# Altium PCB SmartToy_MainBoard_REV02 PCB.PcbDoc (part 1 of 3)
Units mm, origin at the board's own origin, x right, y up, seen from the top; angles counter-clockwise.
Board outline 55 x 50 mm, 2 copper layers (Top Layer, Bottom Layer), stack 0.98 mm thick; 120 components, 113 nets, 389 pads, 211 vias.
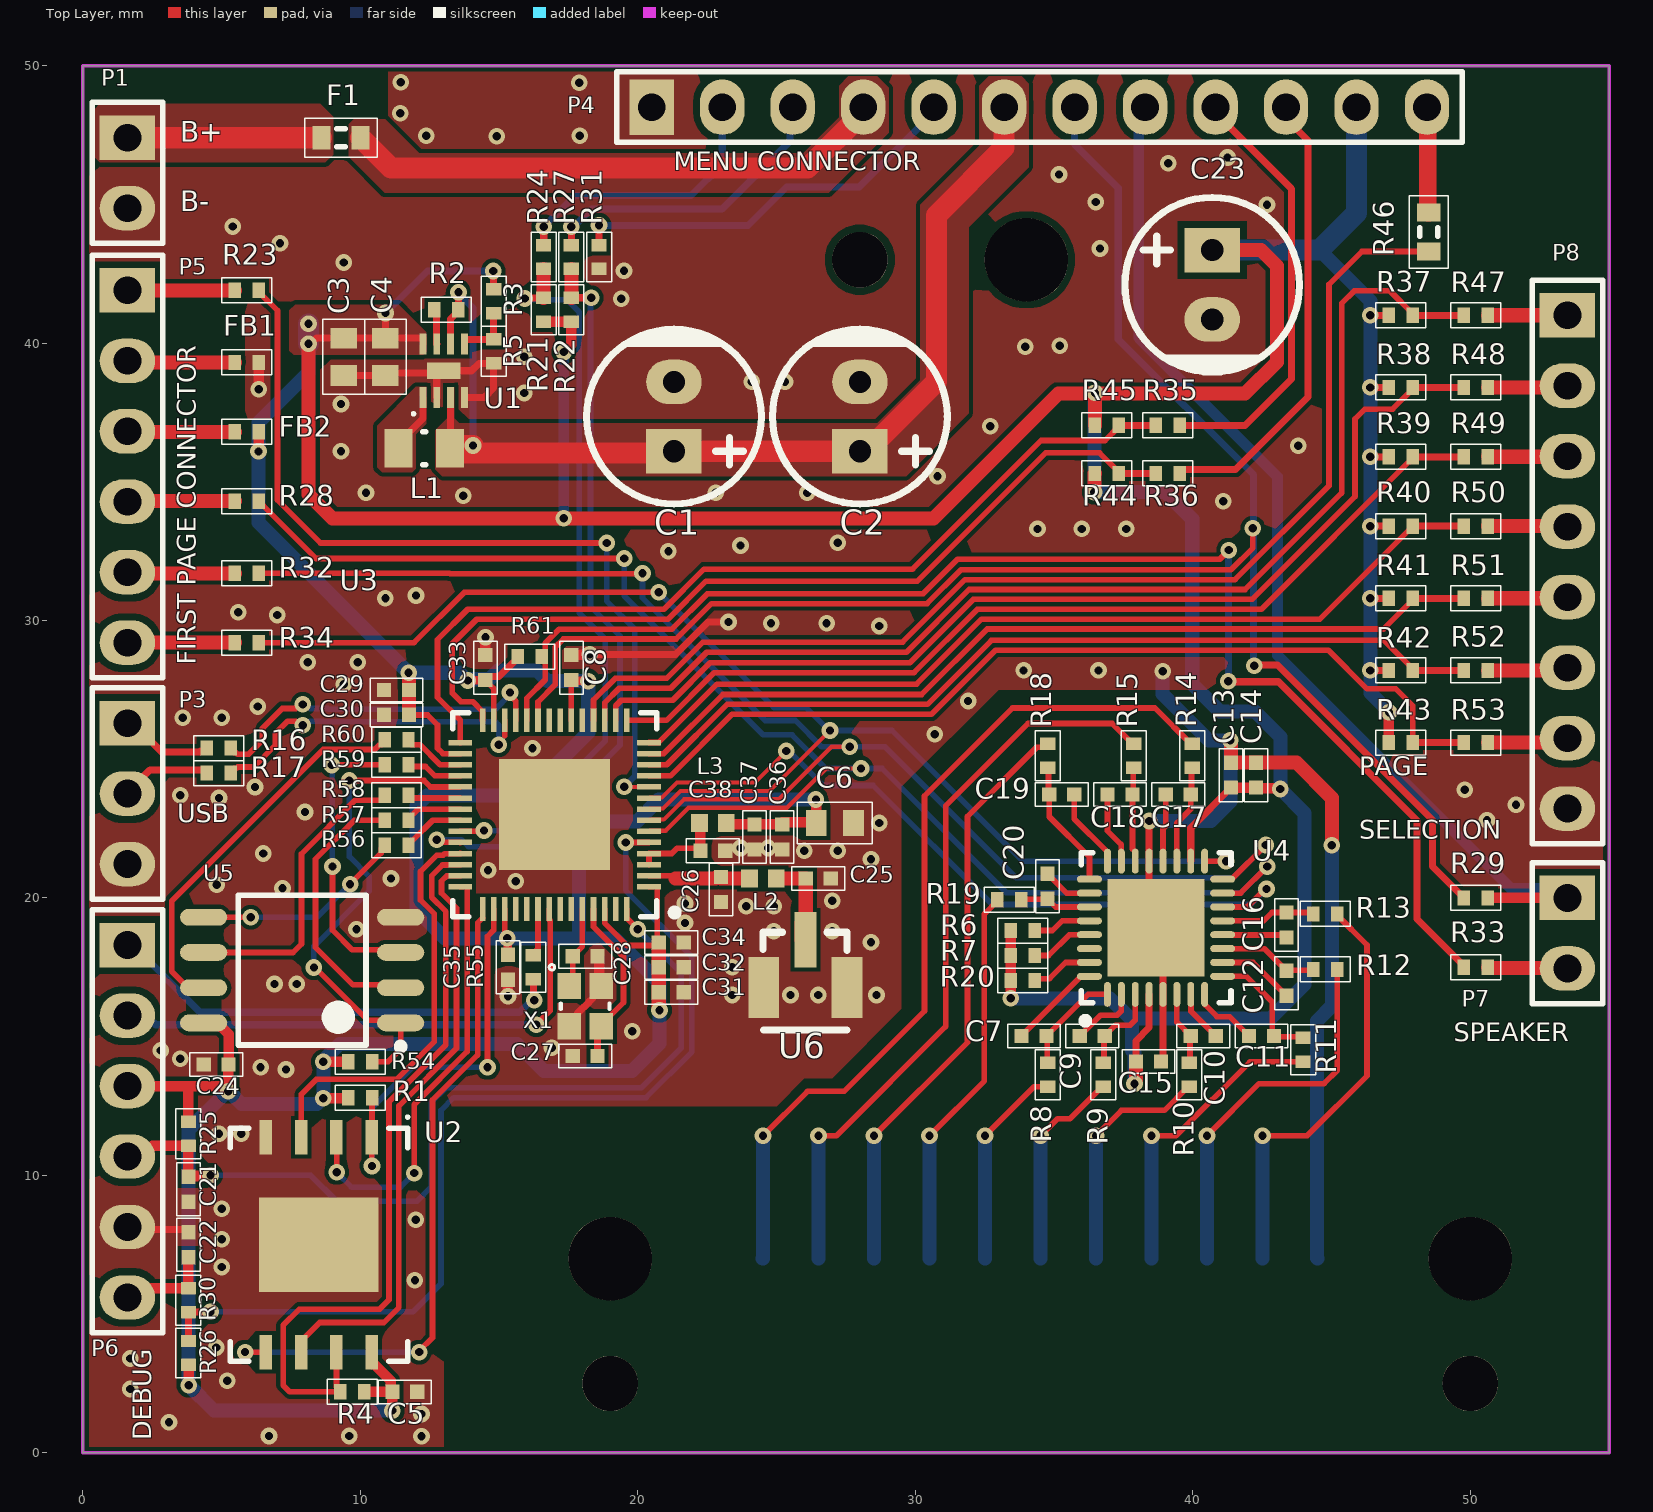
[diagram p0: Top Layer view]
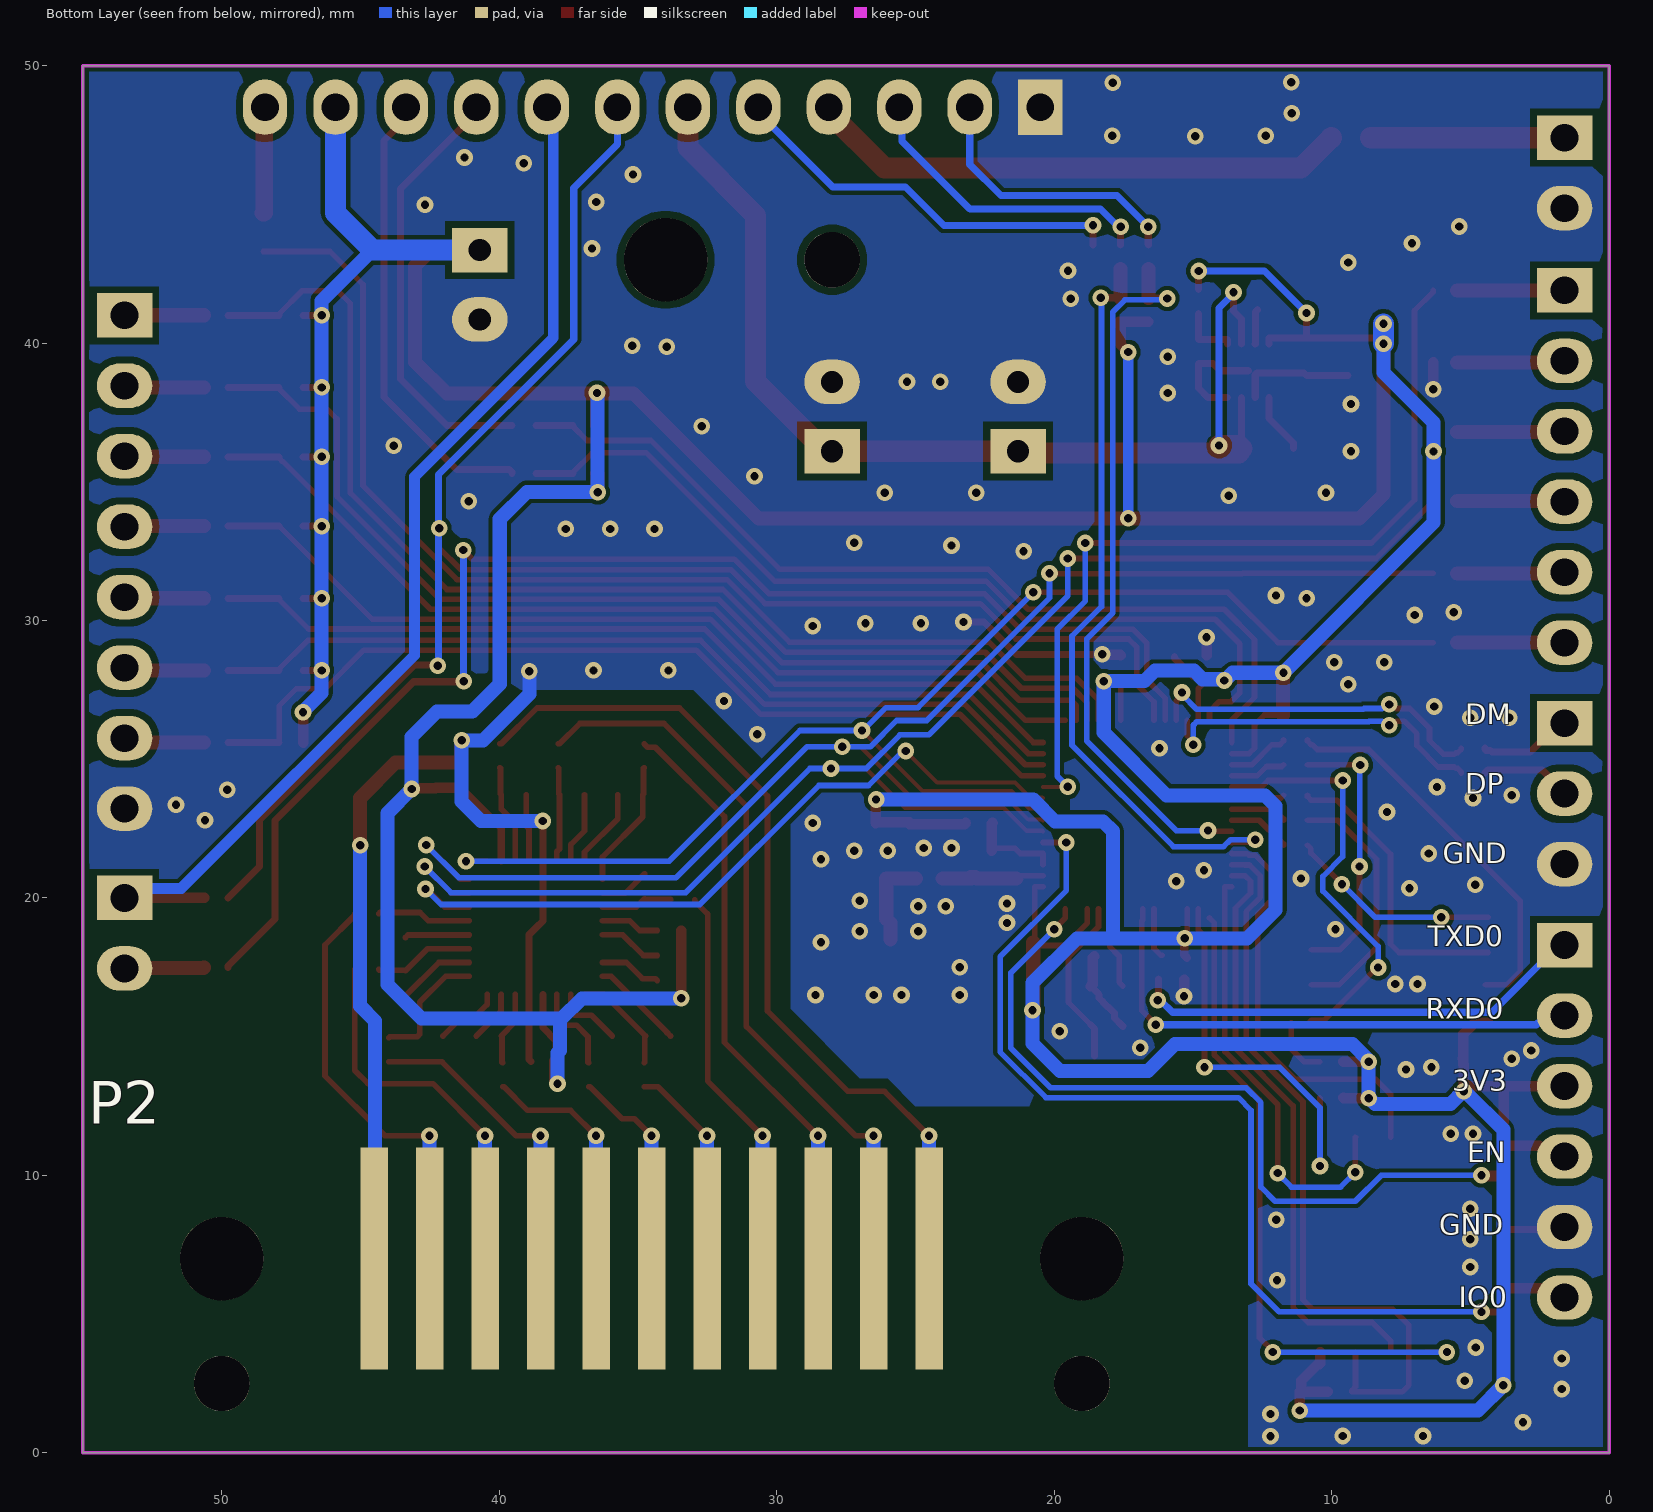
[diagram p1: Bottom Layer view, seen from below]
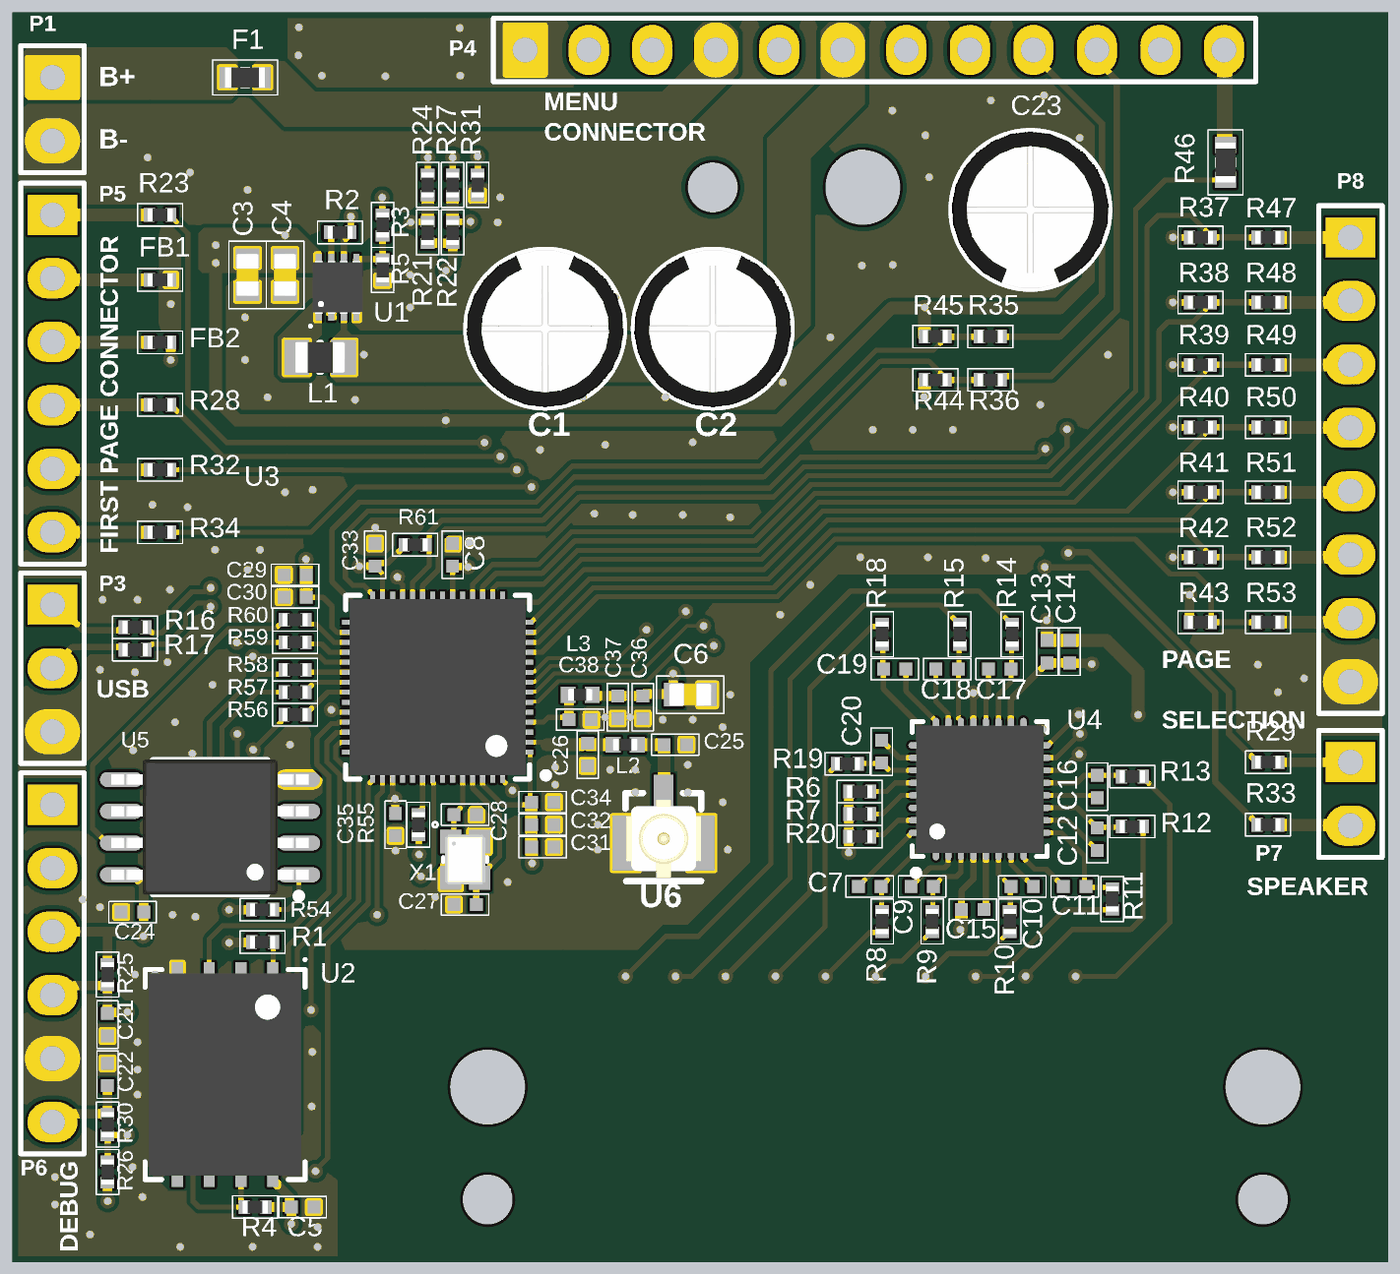
[diagram p3: 3D render of the assembled board from above, using the file's embedded part models]

## Layer stack, top to bottom
Top Solder: solder mask 0.0102, Solder Resist, Dk 3.5
Top Layer: signal copper 0.035
Dielectric 1: dielectric 0.91, FR-4, Dk 4.8
Bottom Layer: signal copper 0.035
Bottom Solder: solder mask 0.0102, Solder Resist, Dk 3.5

## Board outline
0,0 0,50 55,50 55,0

## Design rules (kind name [scope] priority, off if disabled: settings)
Clearance [All] p1: gap=0.152 ignorepadtopadclearanceinfootprint=FALSE except(0.254: THPad-Fill THPad-Poly THPad-Region)
DiffPairsRouting [All] p1: maxlimit=0.254 minlimit=0.152 mostfreqgap=0.254 toplayer_minwidth=0.203 toplayer_maxwidth=0.381 toplayer_prefwidth=0.381 bottomlayer_minwidth=0.203 bottomlayer_maxwidth=0.381 bottomlayer_prefwidth=0.381 maxuncoupledlength=12.7
HoleSize [All] p1: absolutevalues=TRUE maxlimit=5 minlimit=0.025 maxpercent=80.000 minpercent=20.000
HoleToHoleClearance [All] p1: gap=0.025 allowstackedmicrovias=TRUE
MinimumSolderMaskSliver [All] p1: minsoldermaskwidth=0.025
PolygonConnect [All] p1: connectstyle=Direct reliefconductorwidth=0.254 reliefentries=4 polygonreliefangle="90 Angle" airgapwidth=0.254
RoutingVias [All] p1: holewidth=0.3 width=0.6 viastyle="Through Hole" minholewidth=0.3 minwidth=0.6 maxholewidth=0.3 maxwidth=0.6
SilkToSilkClearance [All] p1: silktosilkclearance=0.025
SilkToSolderMaskClearance [IsPad] p1: minsilkscreentomaskgap=0.025 clearancetoexposedcopper=TRUE
SolderMaskExpansion [All] p1: expansion=0.102 istentingtop=FALSE
Width [All] p1: maxlimit=0.762 minlimit=0.152 preferedwidth=0.254
24 further rules are at their usual default settings.

## Classes and differential pairs
net class DIFF90: D_N D_P USB_D_N USB_D_P
differential pair USB_D: +USB_D_P -USB_D_N
differential pair D: +D_P -D_N

## Components (designator, comment, footprint, x,y, rotation, side; value= is the part's Value field where it differs from the comment)
C1 "100uF" CP_6.3X12.5_P2.5MM 21.3,37.35 r90 top
C2 "100uF" CP_6.3X12.5_P2.5MM 28,37.35 r90 top
C3 "22uF" C0603M 9.4,39.5 r90 top
C4 "22uF" C0603M 10.9,39.5 r90 top
C5 "0.1uF" C0402M 11.6,2.2 r180 top
C6 "10uF" C0603M 27.1,22.7 r180 top
C7 "0.01uF" C0402M 34.275,15.025 r180 top
C8 "0.1uF" C0402M 17.6,28.3 r270 top
C9 "0.01uF" C0402M 36.375,15.025 r180 top
C10 "0.01uF" C0402M 40.375,15.025 r0 top
C11 "0.01uF" C0402M 42.475,15.025 r180 top
C12 "0.01uF" C0402M 43.375,16.925 r270 top
C13 "4.7uF" C0402M 41.375,24.425 r90 top
C14 "0.1uF" C0402M 42.275,24.425 r90 top
C15 "0.1uF" C0402M 38.4,14.1 r0 top
C16 "0.01uF" C0402M 43.375,19.025 r270 top
C17 "0.01uF" C0402M 39.475,23.725 r180 top
C18 "0.01uF" C0402M 37.375,23.725 r180 top
C19 "0.01uF" C0402M 35.275,23.725 r0 top
C20 "0.01uF" C0402M 34.757,20.421 r90 top
C21 "0.1uF" C0402M 3.8,9.5 r90 top
C22 "0.1uF" C0402M 3.8,7.5 r270 top
C23 "100uF" CP_6.3X12.5_P2.5MM 40.7,42.1 r270 top
C24 "0.1uF" C0402M 4.8,14 r0 top
C25 "TBD" C0402M 26.5,20.7 r180 top
C26 "TBD" C0402M 23,20.3 r90 top
C27 "12pF" C0402M 18.1,14.3 r0 top
C28 "12pF" C0402M 18.1,17.9 r180 top
C29 "1uF" C0402M 11.3,27.5 r0 top
C30 "0.1uF" C0402M 11.3,26.6 r0 top
C31 "1uF" C0402M 21.2,16.6 r180 top
C32 "100pF" C0402M 21.2,17.5 r180 top
C33 "0.1uF" C0402M 14.5,28.3 r270 top
C34 "0.1uF" C0402M 21.2,18.4 r180 top
C35 "0.1uF" C0402M 15.316,17.501 r90 top
C36 "1uF" C0402M 25.2,22.2 r90 top
C37 "0.1uF" C0402M 24.2,22.2 r90 top
C38 "0.1uF" C0402M 22.7,21.7 r180 top
F1 "MF-FSML125/8-2" R0603M 9.3,47.4 r0 top
FB1 "120R" R0402M 5.9,39.3 r180 top
FB2 "120R" R0402M 5.9,36.8 r180 top
L1 "1uH" IND_0805 12.3,36.2 r180 top
L2 "TBD" IND_0402 24.5,20.7 r180 top
L3 "2nH" IND_0402 22.7,22.7 r180 top
P1 "Header 2" HDR1X2 1.6,47.4 r270 top
P2 "Header 11" TOUCH_CONTACT_MAINBOARD 34.5,7 r180 bottom locked
P3 "Header 3" HDR1X3 1.6,26.3 r270 top
P4 "Header 12" HDR1X12 20.5,48.5 r0 top
P5 "Header 6" HDR1X6 1.6,41.9 r270 top
P6 "Header 6" HDR1X6 1.6,18.3 r270 top
P7 "Header 2" HDR1X2 53.5,20 r270 top
P8 "Header 8" HDR1X8 53.5,41 r270 top
R1 "10k" R0402M 10,12.8 r180 top
R2 "1M" R0402M 13.1,41.2 r180 top
R3 "267k" R0402M 14.8,41.5 r90 top
R4 "10k" R0402M 9.7,2.2 r0 top
R5 "100k" R0402M 14.8,39.7 r90 top
R6 "4.7k" R0402M 33.875,18.825 r0 top
R7 "4.7k" R0402M 33.875,17.925 r0 top
R8 "4.7k" R0402M 34.775,13.625 r90 top
R9 "4.7k" R0402M 36.775,13.625 r90 top
R10 "4.7k" R0402M 39.875,13.625 r90 top
R11 "4.7k" R0402M 43.975,14.525 r90 top
R12 "4.7k" R0402M 44.775,17.425 r180 top
R13 "4.7k" R0402M 44.775,19.425 r180 top
R14 "4.7k" R0402M 39.975,25.125 r270 top
R15 "4.7k" R0402M 37.875,25.125 r270 top
R16 "0.0" R0402M 4.9,25.4 r180 top
R17 "0.0" R0402M 4.9,24.5 r180 top
R18 "4.7k" R0402M 34.775,25.125 r270 top
R19 "4.7k" R0402M 33.385,19.939 r0 top
R20 "100k" R0402M 33.875,17.025 r180 top
R21 "100k" R0402M 16.6,41.2 r270 top
R22 "100k" R0402M 17.6,41.2 r270 top
R23 "1k" R0402M 5.9,41.9 r180 top
R24 "1k" R0402M 16.6,43.1 r90 top
R25 "10k" R0402M 3.8,11.5 r90 top
R26 "10k" R0402M 3.8,3.6 r270 top
R27 "1k" R0402M 17.6,43.1 r90 top
R28 "1k" R0402M 5.9,34.3 r180 top
R29 "27R" R0402M 50.2,20 r180 top
R30 "100" R0402M 3.8,5.5 r90 top
R31 "100" R0402M 18.6,43.1 r90 top
R32 "1k" R0402M 5.9,31.7 r180 top
R33 "27R" R0402M 50.2,17.5 r180 top
R34 "1k" R0402M 5.9,29.2 r180 top
R35 "1k" R0402M 39.1,37.033 r0 top
R36 "1k" R0402M 39.1,35.3 r0 top
R37 "100k" R0402M 47.5,41 r180 top
R38 "100k" R0402M 47.5,38.4 r180 top
R39 "100k" R0402M 47.5,35.9 r180 top
R40 "100k" R0402M 47.5,33.4 r180 top
R41 "100k" R0402M 47.5,30.8 r180 top
R42 "100k" R0402M 47.5,28.2 r180 top
R43 "100k" R0402M 47.5,25.6 r180 top
R44 "100k" R0402M 36.9,35.3 r180 top
R45 "100k" R0402M 36.9,37.033 r180 top
R46 "330R" R0603M 48.5,44 r90 top
R47 "1k" R0402M 50.2,41 r0 top
R48 "1k" R0402M 50.2,38.4 r0 top
R49 "1k" R0402M 50.2,35.9 r0 top
R50 "1k" R0402M 50.2,33.4 r0 top
R51 "1k" R0402M 50.2,30.8 r0 top
R52 "1k" R0402M 50.2,28.2 r0 top
R53 "1k" R0402M 50.2,25.6 r0 top
R54 "10k" R0402M 10,14.1 r180 top
R55 "499" R0402M 16.231,17.501 r270 top
R56 "0.0" R0402M 11.3,21.9 r180 top
R57 "0.0" R0402M 11.3,22.8 r180 top
R58 "0.0" R0402M 11.3,23.7 r180 top
R59 "0.0" R0402M 11.3,24.8 r180 top
R60 "0.0" R0402M 11.3,25.7 r180 top
R61 "10k" R0402M 16.1,28.7 r180 top
U1 "MIC2875-AYMT-T5" SON50P200X60_HS-9N 13,39 r90 top
U2 "W25N01GVZEIG TR" SON127P800X80_HS-9N 8.5,7.5 r270 top
U3 "ESP32-S2" QFN40P700X700X90_HS-57N 17,23 r180 top
U4 "AT42QT1110-MUR" QFN50P500X500X100_HS-33N 38.675,18.925 r90 top
U5 "W25Q128JVSIM" SOIC127P790X216-8N 7.9,17.4 r180 top
U6 "1909763-1" IPEX_ANT 26.036,18.489 r90 top
X1 "40MHz" FA-128 18.1,16.1 r270 top

## Footprints (in the part's own frame and the unit in brackets; to place one, negate y for a bottom-side part, rotate by r counter-clockwise, add the part's x,y. Pads: shape width x height; smd on the part's side, far side on the other; paste and mask are expansions set on the pad)
C0402M [mm] "Capacitor 0402"
  rect 0.51x0.51 smd: 1(-0.45,0) 2(0.45,0)
  silkscreen extent -0.95,-0.43 0.95,0.43, body extent -0.53,-0.28 0.53,0.27, height 0.55
C0603M [mm] "Chip Capacitor 0603"
  rect 0.75x0.95 smd: 1(-0.675,0) 2(0.675,0)
  silkscreen extent -1.35,-0.75 1.35,0.75, body extent -0.85,-0.45 0.85,0.45, height 0.9
CP_6.3X12.5_P2.5MM [mm] "Expart: UPJ1C680MED1TD"
  rect 1.6x2 hole 0.8: 1(-1.25,0)
  oval 1.6x2 hole 0.8: 2(1.25,0)
  silkscreen extent -3.15,-3.15 3.15,3.15, body extent -3.15,-3.15 3.15,3.15, height 11.01
FA-128 [mm]
  rect 0.95x0.85 smd: 1(-0.725,-0.575) 2(0.725,-0.575) 3(0.725,0.575) 4(-0.725,0.575)
  silkscreen extent -1.5,-1.3 0.1,0.88, body extent -1,-0.8 1,0.8, height 0.7
HDR1X2 [mm] "Connector; Header; 2 Position"
  rect 1.6x2 hole 1: 1(0,0)
  oval 1.6x2 hole 1: 2(2.54,0)
  silkscreen extent -1.27,-1.27 3.81,1.27
HDR1X3 [mm] "Connector; Header; 3 Position"
  rect 1.6x2 hole 1: 1(0,0)
  oval 1.6x2 hole 1: 2(2.54,0) 3(5.08,0)
  silkscreen extent -1.27,-1.27 6.35,1.27
HDR1X6 [mm] "Connector; Header; 6 Position"
  rect 1.6x2 hole 1: 1(0,0)
  oval 1.6x2 hole 1: 2(2.54,0) 3(5.08,0) 4(7.62,0) 5(10.16,0) 6(12.7,0)
  silkscreen extent -1.27,-1.27 13.97,1.27
HDR1X8 [mm] "Connector; Header; 8 Position"
  rect 1.6x2 hole 1: 1(0,0)
  oval 1.6x2 hole 1: 2(2.54,0) 3(5.08,0) 4(7.62,0) 5(10.16,0) 6(12.7,0) 7(15.24,0) 8(17.78,0)
  silkscreen extent -1.27,-1.27 19.05,1.27
HDR1X12 [mm] "Connector; Header; 12 Position"
  rect 1.6x2 hole 1: 1(0,0)
  oval 1.6x2 hole 1: 2(2.54,0) 3(5.08,0) 4(7.62,0) 5(10.16,0) 6(12.7,0) 7(15.24,0) 8(17.78,0) 9(20.32,0) 10(22.86,0) 11(25.4,0) 12(27.94,0)
  silkscreen extent -1.27,-1.27 29.21,1.27
IND_0402 [mm] "Chip Inductor, 2-Leads, Body 1.00x0.50mm, IPC Medium Density"
  rect 0.6x0.64 smd: 1(-0.48,0) 2(0.48,0)
  body extent -0.5,-0.25 0.5,0.25, height 0.5
IND_0805 [mm] "Chip Inductor, 2-Leads, Body 2.00x1.25mm, IPC Medium Density"
  rect 1x1.39 smd: 1(-0.93,0) 2(0.93,0)
  silkscreen extent -0.05,-0.6 0.05,0.6, body extent -1,-0.63 1,0.63, height 1.25
IPEX_ANT [mm]
  rect 2x0.8 smd: 1(0,0)
  rect 2.2x1.1 smd: 2(-1.725,-1.5) 2(-1.725,1.5)
  silkscreen extent -3.25,-1.5 0.28,1.52, body extent -3.1,-1.5 0,1.5, height 1.25
QFN40P700X700X90_HS-57N [mm] "QFN, 56-Leads, Body 7.00x7.00mm, Pitch 0.40mm, Thermal Pad 4.00x4.00mm, IPC Medium Density"
  rect 0.85x0.2 smd: 1(-3.4,2.6) 2(-3.4,2.2) 3(-3.4,1.8) 4(-3.4,1.4) 5(-3.4,1) 6(-3.4,0.6) 7(-3.4,0.2) 8(-3.4,-0.2) 9(-3.4,-0.6) 10(-3.4,-1) 11(-3.4,-1.4) 12(-3.4,-1.8) 13(-3.4,-2.2) 14(-3.4,-2.6) 29(3.4,-2.6) 30(3.4,-2.2) 31(3.4,-1.8) 32(3.4,-1.4) 33(3.4,-1) 34(3.4,-0.6) 35(3.4,-0.2) 36(3.4,0.2) 37(3.4,0.6) 38(3.4,1) 39(3.4,1.4) 40(3.4,1.8) 41(3.4,2.2) 42(3.4,2.6)
  rect 0.2x0.85 smd: 15(-2.6,-3.4) 16(-2.2,-3.4) 17(-1.8,-3.4) 18(-1.4,-3.4) 19(-1,-3.4) 20(-0.6,-3.4) 21(-0.2,-3.4) 22(0.2,-3.4) 23(0.6,-3.4) 24(1,-3.4) 25(1.4,-3.4) 26(1.8,-3.4) 27(2.2,-3.4) 28(2.6,-3.4) 43(2.6,3.4) 44(2.2,3.4) 45(1.8,3.4) 46(1.4,3.4) 47(1,3.4) 48(0.6,3.4) 49(0.2,3.4) 50(-0.2,3.4) 51(-0.6,3.4) 52(-1,3.4) 53(-1.4,3.4) 54(-1.8,3.4) 55(-2.2,3.4) 56(-2.6,3.4)
  rect 4x4 smd: 57(0,0)
  silkscreen extent -4.45,-3.67 3.67,3.68, body extent -3.53,-3.53 3.53,3.53, height 0.9
QFN50P500X500X100_HS-33N [mm] "QFN, 32-Leads, Body 5.00x5.00mm, Pitch 0.50mm, Thermal Pad 3.50x3.50mm, IPC Medium Density"
  oval 0.9x0.25 smd: 1(-2.4,1.75) 2(-2.4,1.25) 3(-2.4,0.75) 4(-2.4,0.25) 5(-2.4,-0.25) 6(-2.4,-0.75) 7(-2.4,-1.25) 8(-2.4,-1.75) 17(2.4,-1.75) 18(2.4,-1.25) 19(2.4,-0.75) 20(2.4,-0.25) 21(2.4,0.25) 22(2.4,0.75) 23(2.4,1.25) 24(2.4,1.75)
  oval 0.25x0.9 smd: 9(-1.75,-2.4) 10(-1.25,-2.4) 11(-0.75,-2.4) 12(-0.25,-2.4) 13(0.25,-2.4) 14(0.75,-2.4) 15(1.25,-2.4) 16(1.75,-2.4) 25(1.75,2.4) 26(1.25,2.4) 27(0.75,2.4) 28(0.25,2.4) 29(-0.25,2.4) 30(-0.75,2.4) 31(-1.25,2.4) 32(-1.75,2.4)
  rect 3.5x3.5 smd: 33(0,0)
  silkscreen extent -3.47,-2.7 2.7,2.7, body extent -2.56,-2.56 2.56,2.56, height 1
R0402M [mm] "Chip Resistor 0402"
  rect 0.45x0.55 smd: 1(-0.432,0) 2(0.432,0)
  silkscreen extent -0.9,-0.45 0.9,0.45, body extent -0.5,-0.25 0.5,0.25, height 0.4
R0603M [mm] "Chip Resistor 0603"
  rect 0.65x0.85 smd: 1(-0.7,0) 2(0.7,0)
  silkscreen extent -1.3,-0.7 1.3,0.7, body extent -0.8,-0.4 0.8,0.4, height 0.55
SOIC127P790X216-8N [mm] "SOIC, 8-Leads, Body 5.30x5.30mm, Pitch 1.27mm, IPC Medium Density"
  oval 1.7x0.6 smd: 1(-3.55,1.905) 2(-3.55,0.635) 3(-3.55,-0.635) 4(-3.55,-1.905) 5(3.55,-1.905) 6(3.55,-0.635) 7(3.55,0.635) 8(3.55,1.905)
  silkscreen extent -3.68,-2.7 2.3,2.88, body extent -3.95,-2.7 3.95,2.7, height 2.16
SON50P200X60_HS-9N [mm] "SON, 8-Leads, Body 2.00x2.00mm, Pitch 0.50mm, Thermal Pad 1.20x0.60mm, IPC Medium Density"
  rect 0.75x0.25 smd: 1(-0.965,0.75) 2(-0.965,0.25) 3(-0.965,-0.25) 4(-0.965,-0.75) 5(0.965,-0.75) 6(0.965,-0.25) 7(0.965,0.25) 8(0.965,0.75)
  rect 0.6x1.2 smd: 9(0,0)
  silkscreen extent -1.6,1.04 -1.5,1.14, body extent -1.05,-1 1.05,1, height 0.6
SON127P800X80_HS-9N [mm] "SON, 8-Leads, Body 6.00x8.00mm, Pitch 1.27mm, Thermal Pad 4.30x3.40mm, IPC Medium Density"
  rect 1.25x0.45 smd: 1(-3.87,1.905) 2(-3.87,0.635) 3(-3.87,-0.635) 4(-3.87,-1.905) 5(3.87,-1.905) 6(3.87,-0.635) 7(3.87,0.635) 8(3.87,1.905)
  rect 3.4x4.3 smd paste-1.7: 9(0,0)
  silkscreen extent -4.65,-3.2 4.2,3.25, body extent -4.05,-3.05 4.05,3.05, height 0.8
TOUCH_CONTACT_MAINBOARD [mm]
  rect 1x8 smd: 1(-10,0) 2(-8,0) 3(-6,0) 4(-4,0) 5(-2,0) 6(0,0) 7(2,0) 8(4,0) 9(6,0) 10(8,0) 11(10,0)

## Part data
C1 C2 C23: library part CAP_PL, "CAP ALUM 100UF 20% 16V RADIAL", Case/Package=Radial, Leakage Current=4uA, Manufacturer 1=Nichicon, Manufacturer Part Number 1=UPS1C101MED, Max Operating Temperature=105°C, Min Operating Temperature=-55°C, Package Quantity=200, Ripple Current=250mA, Supplier Part Number 1=493-15821-ND, Tolerance=20%, Voltage=16V, Capacitance=100uF, Category="Aluminum Electrolytic Capacitors", ComponentLink1Description=https://datasheet.ciiva.com/30527/getdatasheetpartid-388103-30527200.pdf?src-supplier=Verical, ComponentLink1URL=https://datasheet.ciiva.com/30527/getdatasheetpartid-388103-30527200.pdf?src-supplier=Verical, ComponentLink2Description=https://datasheet.ciiva.com/11777/0900766b8064973a-11777900.pdf?src-supplier=RSComponents, ComponentLink2URL=https://datasheet.ciiva.com/11777/0900766b8064973a-11777900.pdf?src-supplier=RSComponents, ComponentLink3Description=https://datasheet.ciiva.com/17525/e-ps-17525750.pdf?src-supplier=Avnet+Europe, ComponentLink3URL=https://datasheet.ciiva.com/17525/e-ps-17525750.pdf?src-supplier=Avnet+Europe, ComponentLink4Description=https://datasheet.ciiva.com/109/e-ps-109463.pdf?src-supplier=Digi-Key, ComponentLink4URL=https://datasheet.ciiva.com/109/e-ps-109463.pdf?src-supplier=Digi-Key, ComponentLink5Description=https://datasheet.ciiva.com/11686/e-ps-11686127.pdf?src-supplier=Avnet, ComponentLink5URL=https://datasheet.ciiva.com/11686/e-ps-11686127.pdf?src-supplier=Avnet, Construction=RADIAL, Diameter=6.3mm, Height=11mm, Height - Seated (Max)=0.492inch, Impedance=500mR, Lead Diameter=0.5mm, Lead Pitch=2.5mm, Life (Hours)=2000Hour, Mount="Through Hole", Packaging=Bulk, Pricing 1="1=0.40000, 10=0.27300, 50=0.18220, 100=0.15480, 500=0.10930, 1000=0.09563, 2500=0.09108, 5000=0.08425 (USD)", Radiation Hardening=No, RoHS=Yes, RoHS Compliant=Yes, Series=PS, Stock 1=11875, Supplier 1=Digi-Key, Termination=Radial, Voltage Rating=16V
C3 C4: library part CAP_CER, "CAP CER 22UF 10V X5R 0603", Case Code (Imperial)=0603, Case Code (Metric)=1608, Dielectric=X5R, Manufacturer=Samsung, Manufacturer Part Number=CL10A226MP8NUNE, Max Operating Temperature=85°C, Min Operating Temperature=-55°C, Supplier Part Number 1=1276-1274-1-ND, Tolerance=20%, Voltage Rating=10V, Capacitance=22uF, Case/Package=0603, ComponentLink1Description=https://datasheet.ciiva.com/26838/getdatasheetpartid-746477-26838370.pdf?src-supplier=Verical, ComponentLink1URL=https://datasheet.ciiva.com/26838/getdatasheetpartid-746477-26838370.pdf?src-supplier=Verical, ComponentLink2Description=https://datasheet.ciiva.com/25711/cl10a226mp8nune-25711532.pdf?src-supplier=Digi-Key, ComponentLink2URL=https://datasheet.ciiva.com/25711/cl10a226mp8nune-25711532.pdf?src-supplier=Digi-Key, Contact Plating=Tin, Depth=0.8mm, Height=0.8mm, Lead Free="Lead Free", Length=1.6mm, Mount="Surface Mount", Packaging="Tape and Reel", Pricing 1="1 = 0.20000, 10 = 0.14300, 50 = 0.08100, 100 = 0.06720, 500 = 0.04710, 1000 = 0.03900 (USD)", Radiation Hardening=No, RoHS=Yes, Stock 1=62306, Supplier 1=Digi-Key, Thickness=0.035inch, Width=0.031inch
C5 C8 C14 C15 C21 C22 C24 C30 C33 C34 C35 C37 C38: library part CAP_CER, "CAP CER 0.1UF 50V X7R 0402", Capacitance=100nF, Case Code (Imperial)=0402, Case Code (Metric)=1005, Dielectric=X7R, Dielectric Material=Ceramic, Manufacturer=Murata, Manufacturer Part Number=GRM155R71H104KE14D, Max Operating Temperature=125°C, Min Operating Temperature=-55°C, Package Quantity=10000, Supplier Part Number 1=490-10700-1-ND, Tolerance=10%, Voltage=50V, Case/Package=0402, ComponentLink1Description=https://datasheet.ciiva.com/25741/cl10b104kb8nnnl-25741341.pdf?src-supplier=Digi-Key, ComponentLink1URL=https://datasheet.ciiva.com/25741/cl10b104kb8nnnl-25741341.pdf?src-supplier=Digi-Key, ComponentLink2Description=https://datasheet.ciiva.com/26838/getdatasheetpartid-357523-26838415.pdf?src-supplier=Verical, ComponentLink2URL=https://datasheet.ciiva.com/26838/getdatasheetpartid-357523-26838415.pdf?src-supplier=Verical, ComponentLink3Description=http://www.farnell.com/datasheets/2079156.pdf?src-supplier=Farnell, ComponentLink3URL=http://www.farnell.com/datasheets/2079156.pdf?src-supplier=Farnell, ComponentLink4Description=http://www.mouser.com/ds/2/281/c02e-2905.pdf?src-supplier=Mouser, ComponentLink4URL=http://www.mouser.com/ds/2/281/c02e-2905.pdf?src-supplier=Mouser, ComponentLink5Description=http://components.arrow.com/part/dataview/0323_07030614?src-supplier=Arrow+Europe, ComponentLink5URL=http://components.arrow.com/part/dataview/0323_07030614?src-supplier=Arrow+Europe, ComponentLink6Description=https://search.murata.co.jp/Ceramy/image/img/A01X/G101/ENG/GRM155R71H104KE14-01.pdf?src-supplier=Digi-Key, ComponentLink6URL=https://search.murata.co.jp/Ceramy/image/img/A01X/G101/ENG/GRM155R71H104KE14-01.pdf?src-supplier=Digi-Key, ComponentLink7Description=http://psearch.en.murata.com/capacitor/product/GRM155R71H104KE14%23.pdf?src-supplier=Avnet, ComponentLink7URL=http://psearch.en.murata.com/capacitor/product/GRM155R71H104KE14%23.pdf?src-supplier=Avnet, ComponentLink8Description=http://www.farnell.com/datasheets/2079156.pdf?src-supplier=Element14, ComponentLink8URL=http://www.farnell.com/datasheets/2079156.pdf?src-supplier=Element14, ComponentLink9Description=http://www.farnell.com/datasheets/2079156.pdf?src-supplier=Newark, ComponentLink9URL=http://www.farnell.com/datasheets/2079156.pdf?src-supplier=Newark, Composition=Ceramic, Depth=0.5mm, Dissipation Factor=0.025%, Height=0.5mm, Lead Free="Lead Free", Length=1mm, Material=Ceramic, Mount="Surface Mount", Packaging="Tape and Reel", Pricing 1="1 = 0.10000, 10 = 0.04600, 100 = 0.02050, 500 = 0.01464, 1000 = 0.01150, 2500 = 0.01045, 5000 = 0.00961 (USD)", REACH SVHC="No SVHC", RoHS=Yes, Stock 1=2282266, Supplier 1=Digi-Key, Termination=SMD/SMT, Thickness=0.022inch, Voltage Rating=50V, Voltage Rating (DC)=50V, Weight=0.000212oz, Width=0.5mm
C6: library part CAP_CER, "CAP CER 10UF 16V X5R 0603", Case Code (Imperial)=0603, Case Code (Metric)=1608, Dielectric=X5R, Manufacturer="Taiyo Yuden", Manufacturer Part Number=EMK107BBJ106MA-T, Max Operating Temperature=85°C, Min Operating Temperature=-55°C, Package Quantity=1, Supplier Part Number 1=587-3238-1-ND, Tolerance=20%, Voltage Rating=16V, Capacitance=10uF, Case/Package=0603, Category="Ceramic Capacitors", ComponentLink1Description=https://datasheet.ciiva.com/6259/emk107bbj106ma-t-6259169.pdf?src-supplier=Digi-Key, ComponentLink1URL=https://datasheet.ciiva.com/6259/emk107bbj106ma-t-6259169.pdf?src-supplier=Digi-Key, ComponentLink2Description=https://datasheet.ciiva.com/15920/3emk107bbj106ma-t-15920482.pdf?src-supplier=Onlinecomponents.com, ComponentLink2URL=https://datasheet.ciiva.com/15920/3emk107bbj106ma-t-15920482.pdf?src-supplier=Onlinecomponents.com, ComponentLink3Description=https://datasheet.ciiva.com/34372/463emk107bbj106ma-t-34372674.pdf?src-supplier=Onlinecomponents.com, ComponentLink3URL=https://datasheet.ciiva.com/34372/463emk107bbj106ma-t-34372674.pdf?src-supplier=Onlinecomponents.com, ComponentLink4Description=https://datasheet.ciiva.com/6259/emk107bbj106ma-t-6259164.pdf?src-supplier=Digi-Key, ComponentLink4URL=https://datasheet.ciiva.com/6259/emk107bbj106ma-t-6259164.pdf?src-supplier=Digi-Key, ComponentLink5Description=https://datasheet.ciiva.com/6259/emk107bbj106ma-t-6259167.pdf?src-supplier=Digi-Key, ComponentLink5URL=https://datasheet.ciiva.com/6259/emk107bbj106ma-t-6259167.pdf?src-supplier=Digi-Key, ComponentLink6Description=https://datasheet.ciiva.com/13168/mlcc01-e-13168735.pdf?src-supplier=Mouser, ComponentLink6URL=https://datasheet.ciiva.com/13168/mlcc01-e-13168735.pdf?src-supplier=Mouser, Construction=Flat, Halogen Free="Halogen Free", Height=0.8mm, Length=0.063inch, Mount="Surface Mount", Packaging="Tape and Reel", Pricing 1="1=0.34000, 10=0.23400, 50=0.16400, 100=0.14060, 500=0.10544, 1000=0.08903 (USD)", REACH SVHC=Unknown, RoHS=Yes, RoHS Compliant=Yes, Series=M, Stock 1=599529, Supplier 1=Digi-Key, Termination=SMD/SMT, Thickness=0.031inch, Voltage Rating (DC)=16V, Width=0.031inch
C7 C9 C10 C11 C12 C16 C17 C18 C19 C20: library part CAP_CER, "CAP CER 10000PF 25V X7R 0402", Capacitance=10nF, Case Code (Imperial)=0402, Case Code (Metric)=1005, Dielectric=X7R, Manufacturer=Samsung, Manufacturer Part Number=CL05B103KA5NNNC, Max Operating Temperature=125°C, Min Operating Temperature=-55°C, Package Quantity=1, Supplier Part Number 1=1276-1057-1-ND, Tolerance=10%, Voltage Rating=25V, Case/Package=0402, ComponentLink1Description=https://datasheet.ciiva.com/11586/upy-gphc-x7r-6-3v-to-50v-8-11586326.pdf?src-supplier=Avnet, ComponentLink1URL=https://datasheet.ciiva.com/11586/upy-gphc-x7r-6-3v-to-50v-8-11586326.pdf?src-supplier=Avnet, ComponentLink2Description=https://datasheet.ciiva.com/17434/upy-gphc-x7r-6-3v-to-50v-8-17434572.pdf?src-supplier=Avnet+Europe, ComponentLink2URL=https://datasheet.ciiva.com/17434/upy-gphc-x7r-6-3v-to-50v-8-17434572.pdf?src-supplier=Avnet+Europe, ComponentLink3Description=https://datasheet.ciiva.com/15195/getdatasheetpartid-358612-15195635.pdf?src-supplier=Verical, ComponentLink3URL=https://datasheet.ciiva.com/15195/getdatasheetpartid-358612-15195635.pdf?src-supplier=Verical, ComponentLink4Description=https://datasheet.ciiva.com/16740/cl05b104kq5nnnc-16740683.pdf?src-supplier=Future+Electronics, ComponentLink4URL=https://datasheet.ciiva.com/16740/cl05b104kq5nnnc-16740683.pdf?src-supplier=Future+Electronics, Contact Plating=Tin, Depth=0.5mm, Height=0.5mm, Length=1mm, Mount="Surface Mount", Packaging="Tape and Reel", Pricing 1="1 = 0.10000, 10 = 0.01800, 50 = 0.00960, 100 = 0.00780, 500 = 0.00558, 1000 = 0.00439, 2500 = 0.00399, 5000 = 0.00367 (USD)", Radiation Hardening=No, RoHS=Yes, Stock 1=2714388, Supplier 1=Digi-Key, Thickness=0.022inch, Width=0.02inch
C13: library part CAP_CER, "CAP CER 4.7UF 16V X5R 0402", Case Code (Imperial)=0402, Case Code (Metric)=1005, Manufacturer=Samsung, Manufacturer Part Number=CL05A475MO5NUNC, Max Operating Temperature=85°C, Min Operating Temperature=-55°C, Supplier Part Number 1=1276-6836-6-ND, Tolerance=20%, Voltage Rating=16V, Capacitance=4.7uF, Case/Package=0402, ComponentLink1Description=https://datasheet.ciiva.com/25786/cl05a475mp5nrnc-25786963.pdf?src-supplier=Digi-Key, ComponentLink1URL=https://datasheet.ciiva.com/25786/cl05a475mp5nrnc-25786963.pdf?src-supplier=Digi-Key, ComponentLink2Description=https://datasheet.ciiva.com/16437/cl05b104kq5nnnc-16437353.pdf?src-supplier=Future+Electronics, ComponentLink2URL=https://datasheet.ciiva.com/16437/cl05b104kq5nnnc-16437353.pdf?src-supplier=Future+Electronics, ComponentLink3Description=http://www.farnell.com/datasheets/2710653.pdf?src-supplier=Farnell, ComponentLink3URL=http://www.farnell.com/datasheets/2710653.pdf?src-supplier=Farnell, ComponentLink4Description=http://www.farnell.com/datasheets/2710653.pdf?src-supplier=Newark, ComponentLink4URL=http://www.farnell.com/datasheets/2710653.pdf?src-supplier=Newark, ComponentLink5Description=http://www.samsungsem.com/kr/support/product-search/mlcc/CL05A475MO5NUNC.jsp?src-supplier=Digi-Key, ComponentLink5URL=http://www.samsungsem.com/kr/support/product-search/mlcc/CL05A475MO5NUNC.jsp?src-supplier=Digi-Key, Length=0.039inch, Mount="Surface Mount", Packaging="Tape and Reel", Pricing 1="1 = 0.45000, 10 = 0.32100, 100 = 0.21130, 500 = 0.15656, 1000 = 0.13307, 2500 = 0.12524, 5000 = 0.11741 (USD)", RoHS=Yes, Stock 1=1677309, Supplier 1=Digi-Key, Thickness=0.022inch, Width=0.02inch
C25 C26: library part CAP_CER, "CERAMIC CAPACITOR", Mouting Technology=SMT, Pin=2
C27 C28: library part CAP_CER, "CAP CER 12PF 50V C0G/NP0 0402", Case Code (Imperial)=0402, Case Code (Metric)=1005, Dielectric=C0G, Manufacturer=Murata, Manufacturer Part Number=GRM1555C1H120JA01J, Max Operating Temperature=125°C, Min Operating Temperature=-55°C, Package Quantity=50000, Supplier Part Number 1=490-11375-1-ND, Tolerance=5%, Voltage Rating=50V, Capacitance=12pF, Case/Package=0402, ComponentLink1Description=https://datasheet.ciiva.com/22698/1747438-22698389.pdf?src-supplier=Element14, ComponentLink1URL=https://datasheet.ciiva.com/22698/1747438-22698389.pdf?src-supplier=Element14, ComponentLink2Description=https://datasheet.ciiva.com/6271/grm1555c1h120ja01-01-6271078.pdf?src-supplier=Digi-Key, ComponentLink2URL=https://datasheet.ciiva.com/6271/grm1555c1h120ja01-01-6271078.pdf?src-supplier=Digi-Key, ComponentLink3Description=https://datasheet.ciiva.com/11789/0900766b80ef921d-11789079.pdf?src-supplier=RSComponents, ComponentLink3URL=https://datasheet.ciiva.com/11789/0900766b80ef921d-11789079.pdf?src-supplier=RSComponents, ComponentLink4Description=https://datasheet.ciiva.com/18184/getdatasheetpartid-316477-18184186.pdf?src-supplier=Verical, ComponentLink4URL=https://datasheet.ciiva.com/18184/getdatasheetpartid-316477-18184186.pdf?src-supplier=Verical, ComponentLink5Description=https://datasheet.ciiva.com/29200/453581-da-01-en-vs-kondensator-0402-29200129.pdf?src-supplier=Conrad, ComponentLink5URL=https://datasheet.ciiva.com/29200/453581-da-01-en-vs-kondensator-0402-29200129.pdf?src-supplier=Conrad, ComponentLink6Description=https://datasheet.ciiva.com/6271/partnumbering-e-01-6271081.pdf?src-supplier=Digi-Key, ComponentLink6URL=https://datasheet.ciiva.com/6271/partnumbering-e-01-6271081.pdf?src-supplier=Digi-Key, ComponentLink7Description=https://datasheet.ciiva.com/6271/partnumbering-e-01-6271084.pdf?src-supplier=Digi-Key, ComponentLink7URL=https://datasheet.ciiva.com/6271/partnumbering-e-01-6271084.pdf?src-supplier=Digi-Key, ComponentLink8Description=https://datasheet.ciiva.com/29538/partnumbering-e-01-29538559.pdf?src-supplier=Digi-Key, ComponentLink8URL=https://datasheet.ciiva.com/29538/partnumbering-e-01-29538559.pdf?src-supplier=Digi-Key, ComponentLink9Description=https://datasheet.ciiva.com/6271/partnumbering-e-01-6271189.pdf?src-supplier=Digi-Key, ComponentLink9URL=https://datasheet.ciiva.com/6271/partnumbering-e-01-6271189.pdf?src-supplier=Digi-Key, ComponentLink10Description=https://datasheet.ciiva.com/6271/partnumbering-e-01-6271194.pdf?src-supplier=Digi-Key, ComponentLink10URL=https://datasheet.ciiva.com/6271/partnumbering-e-01-6271194.pdf?src-supplier=Digi-Key, ComponentLink11Description=https://datasheet.ciiva.com/5437/product-5437157.pdf?src-supplier=Mouser, ComponentLink11URL=https://datasheet.ciiva.com/5437/product-5437157.pdf?src-supplier=Mouser, ComponentLink12Description=https://datasheet.ciiva.com/6271/partnumbering-e-01-6271190.pdf?src-supplier=Digi-Key, ComponentLink12URL=https://datasheet.ciiva.com/6271/partnumbering-e-01-6271190.pdf?src-supplier=Digi-Key, ComponentLink13Description=https://datasheet.ciiva.com/11608/product-11608545.pdf?src-supplier=Avnet, ComponentLink13URL=https://datasheet.ciiva.com/11608/product-11608545.pdf?src-supplier=Avnet, Depth=0.5mm, Height=0.5mm, Length=1mm, Mount="Surface Mount", Packaging="Tape and Reel", Pricing 1="1 = 0.10000, 10 = 0.03700, 50 = 0.02040, 100 = 0.01660, 500 = 0.01186, 1000 = 0.00932, 2500 = 0.00847, 5000 = 0.00779 (USD)", Radiation Hardening=No, RoHS=Yes, Stock 1=75852, Supplier 1=Digi-Key, Termination=SMD/SMT, Thickness=0.022inch, Voltage Rating (DC)=50V, Width=0.02inch
C29 C31 C36: library part CAP_CER, "CAP CER 1UF 16V X5R 0402", Case Code (Imperial)=0402, Case Code (Metric)=1005, Dielectric=X5R, Dielectric Material=Ceramic, Manufacturer 1=KEMET, Manufacturer Part Number 1=C0402C105M4PACTU, Max Operating Temperature=85°C, Min Operating Temperature=-55°C, Supplier Part Number 1=399-12288-1-ND, Tolerance=20%, Voltage Rating=16V, Capacitance=1uF, Case/Package=0402, Category="Ceramic Capacitors", ComponentLink1Description=http://www.farnell.com/datasheets/2747130.pdf?src-supplier=Farnell, ComponentLink1URL=http://www.farnell.com/datasheets/2747130.pdf?src-supplier=Farnell, ComponentLink2Description=http://www.kemet.com/docfinder?Partnumber=C0402C105M4PAC7867&src-supplier=Digi-Key, ComponentLink2URL=http://www.kemet.com/docfinder?Partnumber=C0402C105M4PAC7867&src-supplier=Digi-Key, ComponentLink3Description=http://www.farnell.com/datasheets/2747130.pdf?src-supplier=Newark, ComponentLink3URL=http://www.farnell.com/datasheets/2747130.pdf?src-supplier=Newark, ComponentLink4Description=https://api.kemet.com/component-edge/download/datasheet/C0402C105M4PAC7867.pdf?src-supplier=Digi-Key, ComponentLink4URL=https://api.kemet.com/component-edge/download/datasheet/C0402C105M4PAC7867.pdf?src-supplier=Digi-Key, Lead Free="Lead Free", Length=0.039inch, Mount="Surface Mount", Mouting Technology=SMT, Packaging="Tape and Reel", Pin=2, Pricing 1="1=0.12000, 10=0.08400, 50=0.04760, 100=0.03950, 500=0.02770, 1000=0.02294, 2500=0.02135, 5000=0.01953 (USD)", RoHS=Yes, RoHS Compliant=Yes, Stock 1=30464, Supplier 1=Digi-Key, Thickness=0.022inch, Voltage Rating (DC)=16V, Width=0.02inch
C32: library part CAP_CER, "CAP CER 100PF 50V X7R 0402", Case Code (Imperial)=0402, Case Code (Metric)=1005, Dielectric=X7R, Manufacturer 1="Kyocera AVX", Manufacturer Part Number 1=04025C101KAT2A, Max Operating Temperature=125°C, Min Operating Temperature=-55°C, Package Quantity=1, Supplier Part Number 1=478-1089-1-ND, Tolerance=10%, Voltage=50V, Capacitance=100pF, Case/Package=0402, Category="Ceramic Capacitors", ComponentLink1Description=https://datasheet.ciiva.com/34303/1928935-34303276.pdf?src-supplier=Jameco, ComponentLink1URL=https://datasheet.ciiva.com/34303/1928935-34303276.pdf?src-supplier=Jameco, ComponentLink2Description=https://datasheet.ciiva.com/151/cx7r-151045.pdf?src-supplier=Digi-Key, ComponentLink2URL=https://datasheet.ciiva.com/151/cx7r-151045.pdf?src-supplier=Digi-Key, ComponentLink3Description=https://datasheet.ciiva.com/22619/1679506-22619749.pdf?src-supplier=Element14, ComponentLink3URL=https://datasheet.ciiva.com/22619/1679506-22619749.pdf?src-supplier=Element14, ComponentLink4Description=https://datasheet.ciiva.com/151/cx7r-151046.pdf?src-supplier=Digi-Key, ComponentLink4URL=https://datasheet.ciiva.com/151/cx7r-151046.pdf?src-supplier=Digi-Key, ComponentLink5Description=https://datasheet.ciiva.com/151/cx7r-151047.pdf?src-supplier=Digi-Key, ComponentLink5URL=https://datasheet.ciiva.com/151/cx7r-151047.pdf?src-supplier=Digi-Key, ComponentLink6Description=https://datasheet.ciiva.com/28453/1679506-28453959.pdf?src-supplier=Element14, ComponentLink6URL=https://datasheet.ciiva.com/28453/1679506-28453959.pdf?src-supplier=Element14, ComponentLink7Description=https://datasheet.ciiva.com/5415/cx7r-218113-5415051.pdf?src-supplier=Mouser, ComponentLink7URL=https://datasheet.ciiva.com/5415/cx7r-218113-5415051.pdf?src-supplier=Mouser, ComponentLink8Description=https://datasheet.ciiva.com/28586/1818074-28586573.pdf?src-supplier=Element14, ComponentLink8URL=https://datasheet.ciiva.com/28586/1818074-28586573.pdf?src-supplier=Element14, ComponentLink9Description=https://datasheet.ciiva.com/28586/1679506-28586589.pdf?src-supplier=Element14, ComponentLink9URL=https://datasheet.ciiva.com/28586/1679506-28586589.pdf?src-supplier=Element14, ComponentLink10Description=https://datasheet.ciiva.com/16287/cx7r-16287262.pdf?src-supplier=Future+Electronics, ComponentLink10URL=https://datasheet.ciiva.com/16287/cx7r-16287262.pdf?src-supplier=Future+Electronics, Construction=Flat, Depth=0.5mm, Lead Free="Lead Free", Length=1mm, Mount="Surface Mount", Mouting Technology=SMT, Number of Pins=2, Packaging="Tape and Reel", Pin=2, Pricing 1="1=0.10000, 10=0.03200, 50=0.01720, 100=0.01410, 500=0.01006, 1000=0.00791, 2500=0.00719, 5000=0.00661 (USD)", Radiation Hardening=No, REACH SVHC="No SVHC", RoHS=Yes, RoHS Compliant=Yes, Series=-, Stock 1=1401008, Supplier 1=Digi-Key, Termination=SMD/SMT, Thickness=0.022inch, Voltage Rating=50V, Voltage Rating (DC)=50V, Width=0.02inch
F1: library part FUSE, "PTC RESET FUSE 8V 1.25A 0603", Manufacturer 1=Bourns, Supplier Part Number 1=MF-FSML125/8-2TR-ND, Associated Product=01000056Z, Manufacturer Part Number 1=MF-FSML125/8-2, Pricing 1="6000=0.53200 (USD)", RoHS=No, Stock 1=6000, Supplier 1=Digi-Key
FB1 FB2: library part FB, "FERRITE BEAD 120 OHM 0402 1LN", Case Code (Imperial)=0402, Case Code (Metric)=1005, Current Rating=2A, DC Resistance (DCR)=55mR, Manufacturer=Murata, Manufacturer Part Number=BLM15PX121SN1D, Max Operating Temperature=125°C, Min Operating Temperature=-55°C, Package Quantity=10000, Supplier Part Number 1=490-9656-1-ND, Test Frequency=100MHz, Tolerance=25%, Case/Package=0402, Category=Inductors, ComponentLink1Description=https://datasheet.ciiva.com/41449/001172210-da-01-en-drossel-0402-120r-1-0x0-5mm-10000st-41449498.pdf?src-supplier=Conrad, ComponentLink1URL=https://datasheet.ciiva.com/41449/001172210-da-01-en-drossel-0402-120r-1-0x0-5mm-10000st-41449498.pdf?src-supplier=Conrad, ComponentLink2Description=https://datasheet.ciiva.com/29364/l0110e-29364069.pdf?src-supplier=Digi-Key, ComponentLink2URL=https://datasheet.ciiva.com/29364/l0110e-29364069.pdf?src-supplier=Digi-Key, ComponentLink3Description=https://datasheet.ciiva.com/41860/l0110e-41860699.pdf?src-supplier=Digi-Key, ComponentLink3URL=https://datasheet.ciiva.com/41860/l0110e-41860699.pdf?src-supplier=Digi-Key, Height=0.5mm, Impedance=120R, Lead Free="Lead Free", Length=1mm, Material=Steel, Max Current Rating=2A, Max DC Current=2A, Number of Circuits=1, Number of Lines=1, Number of Pins=2, Packaging="Tape and Reel", Pricing 1="1=0.12000, 10=0.09500, 25=0.07400, 50=0.06140, 100=0.05280, 250=0.04228, 500=0.03806, 1000=0.03171, 5000=0.02960 (USD)", REACH SVHC="No SVHC", RoHS=Yes, RoHS Compliant=Yes, Series="EMIFIL®, BLM15P", Stock 1=73734, Supplier 1=Digi-Key, Termination=SMD/SMT, Weight=2.3E-05oz, Width=0.5mm
L1: library part IND_SMD, "FIXED IND 1UH 1.3A 82.5 MOHM SMD", Case Code (Imperial)=0805, Case Code (Metric)=2012, Current Rating=1.3A, DC Resistance (DCR)=82.5mR, Inductance Tolerance=30%, Manufacturer 1=Murata, Manufacturer Part Number 1=LQM21PN1R0NGRD, Max Operating Temperature=125°C, Min Operating Temperature=-55°C, Package Quantity=4000, Self Resonant Frequency=50MHz, Supplier Part Number 1=490-7780-1-ND, Test Frequency=1MHz, Case/Package=0805, Category="Fixed Inductors", ComponentLink1Description=https://datasheet.ciiva.com/4965/l0075s0104lqm21p-gr-125292-4965537.pdf?src-supplier=Mouser, ComponentLink1URL=https://datasheet.ciiva.com/4965/l0075s0104lqm21p-gr-125292-4965537.pdf?src-supplier=Mouser, ComponentLink2Description=https://datasheet.ciiva.com/30490/0900766b812561d6-30490175.pdf?src-supplier=RSComponents, ComponentLink2URL=https://datasheet.ciiva.com/30490/0900766b812561d6-30490175.pdf?src-supplier=RSComponents, Core Material=Ferrite, DC Current=1.3A, Depth=1.4mm, Height=0.9mm, Height - Seated (Max)=0.039inch, Inductance=1uH, Length=2mm, Max DC Current=1.3A, Military Standard=Not, Mount="Surface Mount", Packaging="Tape and Reel", Pricing 1="1=0.24000, 10=0.21400, 25=0.18760, 50=0.16060, 100=0.14730, 250=0.13388, 500=0.12584, 1000=0.09639 (USD)", REACH SVHC="No SVHC", RoHS=Yes, RoHS Compliant=Yes, Series=LQM21PN_GR, Shielding=Shielded, Stock 1=20158, Supplier 1=Digi-Key, Termination=SMD/SMT, Tolerance=30%, Weight=0.000194oz, Width=0.049inch
L2: library part IND_SMD, "INDUCTOR SMD"
L3: library part IND_SMD, "FIXED IND 2NH 700MA 120 MOHM SMD", Case Code (Imperial)=0402, Case Code (Metric)=1005, Current Rating=700mA, DC Resistance (DCR)=120mR, Manufacturer 1="Taiyo Yuden", Manufacturer Part Number 1=HK10052N0S-T, Max DC Current=300mA, Max Operating Temperature=125°C, Min Operating Temperature=-55°C, Package Quantity=10000, Self Resonant Frequency=6GHz, Supplier Part Number 1=587-1502-1-ND, Test Frequency=100MHz, Case/Package=0402, Category="Fixed Inductors", ComponentLink1Description=https://datasheet.ciiva.com/7153/hk10052n0s-t-ss-7153840.pdf?src-supplier=Newark, ComponentLink1URL=https://datasheet.ciiva.com/7153/hk10052n0s-t-ss-7153840.pdf?src-supplier=Newark, ComponentLink2Description=https://datasheet.ciiva.com/15986/1438hk10052n0s-t-15986357.pdf?src-supplier=Onlinecomponents.com, ComponentLink2URL=https://datasheet.ciiva.com/15986/1438hk10052n0s-t-15986357.pdf?src-supplier=Onlinecomponents.com, ComponentLink3Description=https://datasheet.ciiva.com/30105/675hk10052n0s-t-30105478.pdf?src-supplier=Onlinecomponents.com, ComponentLink3URL=https://datasheet.ciiva.com/30105/675hk10052n0s-t-30105478.pdf?src-supplier=Onlinecomponents.com, ComponentLink4Description=https://datasheet.ciiva.com/8505/hk10052n0s-t-ss-8505550.pdf?src-supplier=Avnet, ComponentLink4URL=https://datasheet.ciiva.com/8505/hk10052n0s-t-ss-8505550.pdf?src-supplier=Avnet, Core Material=Ferrite,Ceramic, Depth=0.55mm, Halogen Free="Halogen Free", Height=0.5mm, Height - Seated (Max)=0.022inch, Inductance=2nH, Lead Free=Exempt, Length=0.039inch, Mount="Surface Mount", Number of Pins=2, Packaging="Tape and Reel", Pricing 1="1=0.10000, 10=0.02600, 25=0.02360, 50=0.02100, 100=0.01780, 250=0.01576, 500=0.01444, 1000=0.01234, 2500=0.01102 (USD)", Q Factor=8, Radiation Hardening=No, REACH SVHC="No SVHC", RoHS=Yes, RoHS Compliant=Yes, Series=HK, Shielding=Unshielded, Stock 1=13842, Supplier 1=Digi-Key, Termination=SMD/SMT, Weight=2.3E-05oz, Width=0.5mm
P1 P7: "Header, 2-Pin", LatestRevisionDate=17-Jul-2002, LatestRevisionNote="Re-released for DXP Platform.", Publisher="Altium Limited"
P2: "Header, 11-Pin", LatestRevisionDate=17-Jul-2002, LatestRevisionNote="Re-released for DXP Platform.", Publisher="Altium Limited"
P3: "Header, 3-Pin", LatestRevisionDate=17-Jul-2002, LatestRevisionNote="Re-released for DXP Platform.", Publisher="Altium Limited"
P4: "Header, 12-Pin", LatestRevisionDate=17-Jul-2002, LatestRevisionNote="Re-released for DXP Platform.", Publisher="Altium Limited"
P5 P6: "Header, 6-Pin", LatestRevisionDate=17-Jul-2002, LatestRevisionNote="Re-released for DXP Platform.", Publisher="Altium Limited"
P8: "Header, 8-Pin", LatestRevisionDate=17-Jul-2002, LatestRevisionNote="Re-released for DXP Platform.", Publisher="Altium Limited"
R1 R4 R54: library part RES_SMD, "RES SMD 10K OHM 1% 1/16W 0402", Case Code (Imperial)=0402, Case Code (Metric)=1005, Manufacturer=Yageo, Manufacturer Part Number=RC0402FR-0710KL, Max Operating Temperature=155°C, Min Operating Temperature=-55°C, Power Rating=62.5mW, Resistance=10kR, Supplier Part Number 1=311-10.0KLRCT-ND, Temperature Coefficient=100ppm/°C, Tolerance=1%, Voltage Rating=50V, Case/Package=0402, ComponentLink1Description=https://datasheet.ciiva.com/7660/38590-7660789.pdf?src-supplier=Element14, ComponentLink1URL=https://datasheet.ciiva.com/7660/38590-7660789.pdf?src-supplier=Element14, ComponentLink2Description=https://datasheet.ciiva.com/15189/getdatasheetpartid-409289-15189591.pdf?src-supplier=Verical, ComponentLink2URL=https://datasheet.ciiva.com/15189/getdatasheetpartid-409289-15189591.pdf?src-supplier=Verical, ComponentLink3Description=https://datasheet.ciiva.com/46440/1868787-46440891.pdf?src-supplier=Element14, ComponentLink3URL=https://datasheet.ciiva.com/46440/1868787-46440891.pdf?src-supplier=Element14, ComponentLink4Description=https://datasheet.ciiva.com/7983/443971-7983596.pdf?src-supplier=Element14, ComponentLink4URL=https://datasheet.ciiva.com/7983/443971-7983596.pdf?src-supplier=Element14, ComponentLink5Description=https://datasheet.ciiva.com/7746/1738695-7746239.pdf?src-supplier=Element14, ComponentLink5URL=https://datasheet.ciiva.com/7746/1738695-7746239.pdf?src-supplier=Element14, ComponentLink6Description=https://datasheet.ciiva.com/22747/443971-22747519.pdf?src-supplier=Element14, ComponentLink6URL=https://datasheet.ciiva.com/22747/443971-22747519.pdf?src-supplier=Element14, ComponentLink7Description=https://datasheet.ciiva.com/7660/38568-7660787.pdf?src-supplier=Element14, ComponentLink7URL=https://datasheet.ciiva.com/7660/38568-7660787.pdf?src-supplier=Element14, ComponentLink8Description=https://datasheet.ciiva.com/7849/1784430-7849813.pdf?src-supplier=Element14, ComponentLink8URL=https://datasheet.ciiva.com/7849/1784430-7849813.pdf?src-supplier=Element14, ComponentLink9Description=https://datasheet.ciiva.com/7849/1686128-7849814.pdf?src-supplier=Element14, ComponentLink9URL=https://datasheet.ciiva.com/7849/1686128-7849814.pdf?src-supplier=Element14, ComponentLink10Description=https://datasheet.ciiva.com/7849/1784430-7849815.pdf?src-supplier=Element14, ComponentLink10URL=https://datasheet.ciiva.com/7849/1784430-7849815.pdf?src-supplier=Element14, ComponentLink11Description=https://datasheet.ciiva.com/22747/1018594-22747512.pdf?src-supplier=Element14, ComponentLink11URL=https://datasheet.ciiva.com/22747/1018594-22747512.pdf?src-supplier=Element14, ComponentLink12Description=https://datasheet.ciiva.com/12667/pyu-rc0402-51-rohs-l-6-r-12667067.pdf?src-supplier=Mouser, ComponentLink12URL=https://datasheet.ciiva.com/12667/pyu-rc0402-51-rohs-l-6-r-12667067.pdf?src-supplier=Mouser, ComponentLink13Description=https://datasheet.ciiva.com/7983/1018594-7983486.pdf?src-supplier=Element14, ComponentLink13URL=https://datasheet.ciiva.com/7983/1018594-7983486.pdf?src-supplier=Element14, Composition="Thick Film", Depth=0.5mm, Height=0.32mm, Lead Free="Lead Free", Lead Pitch=0.2mm, Length=1mm, Military Standard=Not, Number of Pins=2, Number of Terminations=2, Packaging="Tape and Reel", Pricing 1="1 = 0.10000, 10 = 0.01600, 100 = 0.00640, 1000 = 0.00289, 2500 = 0.00251, 5000 = 0.00207 (USD)", REACH SVHC="No SVHC", RoHS=Yes, Stock 1=51893807, Supplier 1=Digi-Key, Termination=SMD/SMT, Voltage Rating (DC)=50V, Width=0.5mm, Working Voltage=50V
R2: library part RES_SMD, "RES SMD 1M OHM 1% 1/16W 0402", Case Code (Imperial)=0402, Case Code (Metric)=1005, Manufacturer 1=Yageo, Manufacturer Part Number 1=RC0402FR-071ML, Max Operating Temperature=155°C, Max Power Dissipation=63mW, Min Operating Temperature=-55°C, Resistance=1MR, Resistance Tolerance=1%, Resistor Type="Thick Film", Supplier Part Number 1=311-1.00MLRCT-ND, Temperature Coefficient=100ppm/°C, Voltage Rating=50V, Case/Package=0402, Category="Chip SMD Resistors", ComponentLink1Description=https://datasheet.ciiva.com/11808/0900766b80c66297-11808125.pdf?src-supplier=RSComponents, ComponentLink1URL=https://datasheet.ciiva.com/11808/0900766b80c66297-11808125.pdf?src-supplier=RSComponents, ComponentLink2Description=https://datasheet.ciiva.com/46394/1018594-46394951.pdf?src-supplier=Element14, ComponentLink2URL=https://datasheet.ciiva.com/46394/1018594-46394951.pdf?src-supplier=Element14, ComponentLink3Description=https://datasheet.ciiva.com/16741/pyu-rc0402-51-rohs-l-6-r-16741081.pdf?src-supplier=Future+Electronics, ComponentLink3URL=https://datasheet.ciiva.com/16741/pyu-rc0402-51-rohs-l-6-r-16741081.pdf?src-supplier=Future+Electronics, ComponentLink4Description=https://datasheet.ciiva.com/7849/1018594-7849882.pdf?src-supplier=Element14, ComponentLink4URL=https://datasheet.ciiva.com/7849/1018594-7849882.pdf?src-supplier=Element14, ComponentLink5Description=https://datasheet.ciiva.com/7849/1018594-7849883.pdf?src-supplier=Element14, ComponentLink5URL=https://datasheet.ciiva.com/7849/1018594-7849883.pdf?src-supplier=Element14, Construction=Rectangular, Depth=0.5mm, Features="Moisture Resistant", Height=0.32mm, Lead Free="Lead Free", Length=1mm, Military Standard=Not, Mouting Technology=SMT, Number of Terminations=2, Packaging="Tape and Reel", Pin=2, Power Rating=63mW, Pricing 1="1=0.10000, 10=0.01600, 100=0.00660, 1000=0.00299, 2500=0.00259, 5000=0.00214 (USD)", REACH SVHC=Unknown, RoHS=Yes, RoHS Compliant=Yes, Series=RC, Size Code=0402, Stock 1=4089105, Supplier 1=Digi-Key, Technology="THICK FILM", Termination=SMD/SMT, Tolerance=1%
R3: library part RES_SMD, "RES SMD 267k OHM 1% 1/16W 0402", Case Code (Imperial)=0402, Case Code (Metric)=1005, Manufacturer 1=Yageo, Manufacturer Part Number 1=RC0402FR-07267KL, Max Operating Temperature=155°C, Max Power Dissipation=63mW, Min Operating Temperature=-55°C, Power Rating=62.5mW, Resistance=267kR, Resistor Type="Thick Film", Supplier Part Number 1=603-RC0402FR-07267KL, Temperature Coefficient=100ppm/°C, Tolerance=1%, Voltage Rating=50V, Case/Package=0402, Category="Chip SMD Resistors", ComponentLink1Description=https://datasheet.ciiva.com/28392/pyu-rc0402-51-rohs-l-6-28392555.pdf?src-supplier=Avnet+Europe, ComponentLink1URL=https://datasheet.ciiva.com/28392/pyu-rc0402-51-rohs-l-6-28392555.pdf?src-supplier=Avnet+Europe, ComponentLink2Description=https://datasheet.ciiva.com/26830/getdatasheetpartid-323727-26830012.pdf?src-supplier=Verical, ComponentLink2URL=https://datasheet.ciiva.com/26830/getdatasheetpartid-323727-26830012.pdf?src-supplier=Verical, ComponentLink3Description=https://datasheet.ciiva.com/8886/pyu-rc0402-51-rohs-l-6-8886495.pdf?src-supplier=Avnet, ComponentLink3URL=https://datasheet.ciiva.com/8886/pyu-rc0402-51-rohs-l-6-8886495.pdf?src-supplier=Avnet, ComponentLink4Description=https://datasheet.ciiva.com/12577/pyu-rc0402-51-rohs-l-6-r-12577167.pdf?src-supplier=Mouser, ComponentLink4URL=https://datasheet.ciiva.com/12577/pyu-rc0402-51-rohs-l-6-r-12577167.pdf?src-supplier=Mouser, ComponentLink5Description=https://datasheet.ciiva.com/16868/pyu-rc0402-51-rohs-l-6-16868735.pdf?src-supplier=Avnet+Europe, ComponentLink5URL=https://datasheet.ciiva.com/16868/pyu-rc0402-51-rohs-l-6-16868735.pdf?src-supplier=Avnet+Europe, Construction=Rectangular, Contact Plating=Tin,Matte, Depth=0.5mm, Features="Moisture Resistant", Height=0.016inch, Lead Free="Lead Free", Length=1mm, Military Standard=Not, Mouting Technology=SMT, Number of Terminations=2, Packaging="Tape and Reel", Pin=2, Pricing 1="1=0.10000, 10=0.01200, 50=0.01200, 100=0.00400, 1000=0.00400, 10000=0.00300 (USD)", RoHS=Yes, RoHS Compliant=Yes, Series=RC, Stock 1=9880, Supplier 1=Mouser, Termination=SMD/SMT, Voltage Rating (DC)=50V, Weight=2.3E-05oz, Width=0.02inch
R5: library part RES_SMD, "RES SMD 100K OHM 1% 1/16W 0402", Case Code (Imperial)=0402, Case Code (Metric)=1005, Manufacturer 1=Yageo, Manufacturer Part Number 1=RC0402FR-07100KL, Max Operating Temperature=155°C, Max Power Dissipation=63mW, Min Operating Temperature=-55°C, Package Quantity=1, Resistance=100kR, Resistance Tolerance=1%, Resistor Type="Thick Film", Supplier Part Number 1=311-100KLRCT-ND, Temperature Coefficient=100ppm/°C, Voltage Rating=50V, Case/Package=0402, Category="Chip SMD Resistors", ComponentLink1Description=https://datasheet.ciiva.com/11819/0900766b80c66297-11819452.pdf?src-supplier=RSComponents, ComponentLink1URL=https://datasheet.ciiva.com/11819/0900766b80c66297-11819452.pdf?src-supplier=RSComponents, ComponentLink2Description=https://datasheet.ciiva.com/2453/pyu-r-int-thick-7-2453361.pdf?src-supplier=Digi-Key, ComponentLink2URL=https://datasheet.ciiva.com/2453/pyu-r-int-thick-7-2453361.pdf?src-supplier=Digi-Key, ComponentLink3Description=https://datasheet.ciiva.com/2453/pyu-r-int-thick-7-2453362.pdf?src-supplier=Digi-Key, ComponentLink3URL=https://datasheet.ciiva.com/2453/pyu-r-int-thick-7-2453362.pdf?src-supplier=Digi-Key, ComponentLink4Description=https://datasheet.ciiva.com/2453/pyu-r-int-thick-7-2453363.pdf?src-supplier=Digi-Key, ComponentLink4URL=https://datasheet.ciiva.com/2453/pyu-r-int-thick-7-2453363.pdf?src-supplier=Digi-Key, ComponentLink5Description=https://datasheet.ciiva.com/22747/1018594-22747509.pdf?src-supplier=Element14, ComponentLink5URL=https://datasheet.ciiva.com/22747/1018594-22747509.pdf?src-supplier=Element14, ComponentLink6Description=https://datasheet.ciiva.com/15189/getdatasheetpartid-323696-15189334.pdf?src-supplier=Verical, ComponentLink6URL=https://datasheet.ciiva.com/15189/getdatasheetpartid-323696-15189334.pdf?src-supplier=Verical, ComponentLink7Description=https://datasheet.ciiva.com/12667/pyu-rc0402-51-rohs-l-6-r-12667930.pdf?src-supplier=Mouser, ComponentLink7URL=https://datasheet.ciiva.com/12667/pyu-rc0402-51-rohs-l-6-r-12667930.pdf?src-supplier=Mouser, Construction=Rectangular, Depth=0.5mm, Features="Moisture Resistant", Height=0.016inch, Lead Free="Lead Free", Length=0.039inch, Military Standard=Not, Mouting Technology=SMT, Number of Terminations=2, Packaging="Tape and Reel", Pin=2, Power Rating=63mW, Pricing 1="1=0.10000, 10=0.01600, 100=0.00660, 1000=0.00299, 2500=0.00259, 5000=0.00214 (USD)", REACH SVHC="No SVHC", RoHS=Yes, RoHS Compliant=Yes, Series=RC, Stock 1=4848920, Supplier 1=Digi-Key, Technology="THICK FILM", Termination=SMD/SMT, Tolerance=1%, Width=0.02inch, Working Voltage=50V